# Altium PCB V1.PcbDoc
Units mm, origin at the board's own origin, x right, y up, seen from the top; angles counter-clockwise.
Board outline 152.4 x 101.6 mm, 2 copper layers (Top Layer, Bottom Layer); 11 components, 40 nets, 84 pads, 42 vias.
Unrouted connection lines stored in the file: 2.
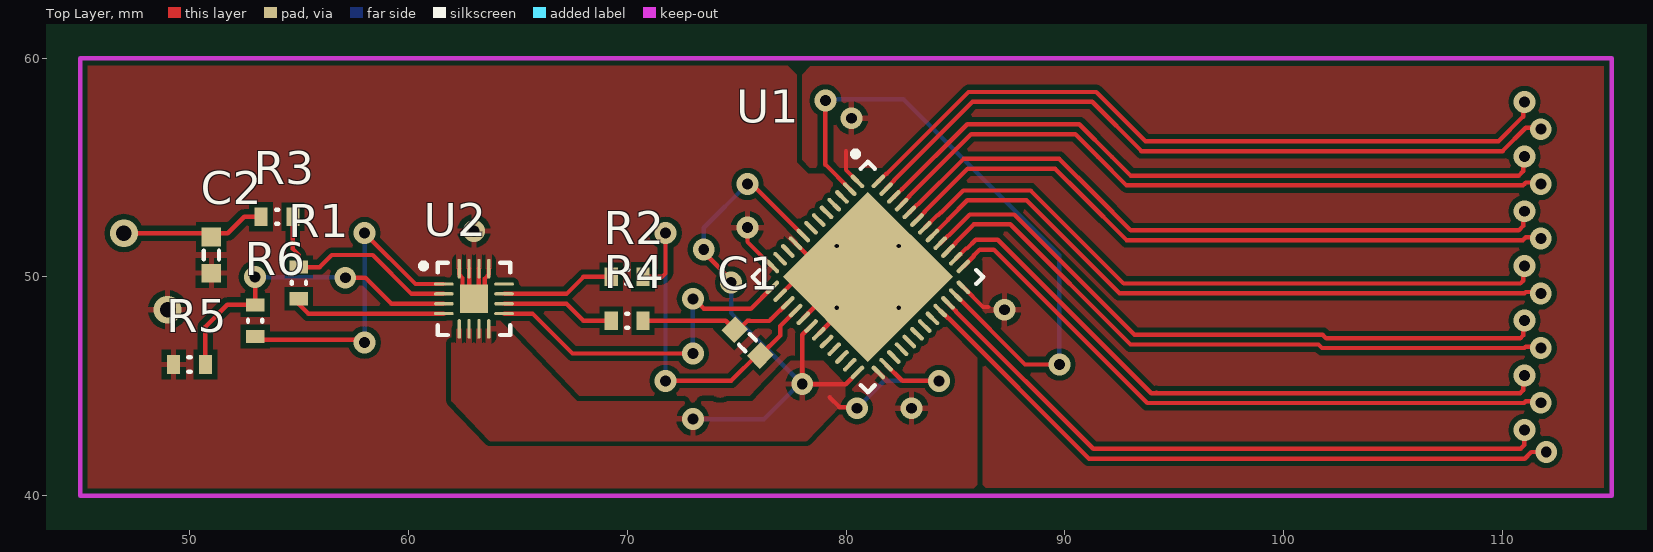
[diagram p0: Top Layer view]
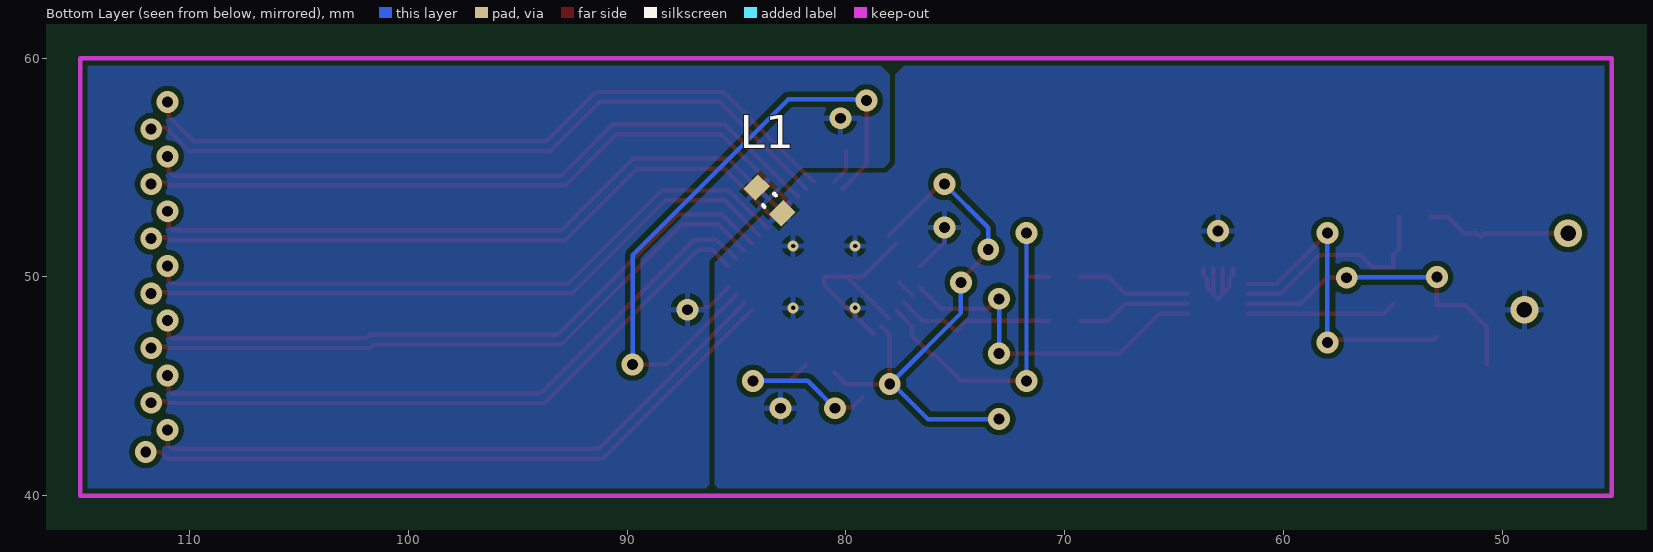
[diagram p1: Bottom Layer view, seen from below]

## Layer stack, top to bottom
Top Solder: solder mask 0.0102, Solder Resist, Dk 3.5
Top Layer: signal copper 0.0356
Dielectric1: dielectric 0.32, FR-4, Dk 4.8
Bottom Layer: signal copper 0.0356
Bottom Solder: solder mask 0.0102, Solder Resist, Dk 3.5

## Board outline
25.4,25.4 177.8,25.4 177.8,127 25.4,127

## Design rules (kind name [scope] priority, off if disabled: settings)
Clearance [All] p1: gap=0.24 ignorepadtopadclearanceinfootprint=FALSE except(0: Arc-Hole Track-Hole SMDPad-Hole THPad-Hole Via-Hole Fill-Hole Poly-Hole Region-Hole Text-Hole)
DiffPairsRouting DiffPairsRouting_1 [All] p1: maxlimit=0.254 minlimit=0.25 mostfreqgap=0.25 toplayer_minwidth=0.2 toplayer_maxwidth=0.381 toplayer_prefwidth=0.381 bottomlayer_minwidth=0.2 bottomlayer_maxwidth=0.381 bottomlayer_prefwidth=0.381 maxuncoupledlength=30
MatchedLengths MatchedLengths_2 [InDifferentialPair ('D_D0_D1')] p1: tolerance=25.4 checknetsindiffpair=FALSE checkdiffpairvsdiffpair=TRUE checkxsignals=TRUE checkothers=TRUE
MatchedLengths MatchedLengths_1 [InDifferentialPairClass('DATA')] p2: tolerance=5 checknetsindiffpair=FALSE checkdiffpairvsdiffpair=TRUE checkxsignals=TRUE checkothers=TRUE
MatchedLengths [InDifferentialPairClass('DATA')] p3: tolerance=0.5 checknetsindiffpair=TRUE checkdiffpairvsdiffpair=FALSE checkxsignals=FALSE checkothers=FALSE
PolygonConnect [All] p1: connectstyle=Relief reliefconductorwidth=0.254 reliefentries=4 polygonreliefangle="90 Angle" airgapwidth=0.254
RoomDefinition ShV_1 [InComponentClass('ShV_1')] p1: confinementstyle=ConfineIn formatcopy=TRUE lockcomponents=FALSE outline 45,40 115,40 115,60 45,60
RoutingVias [All] p1: holewidth=0.711 width=1.27 viastyle="Through Hole" minholewidth=0.45 minwidth=0.9 maxholewidth=0.711 maxwidth=1.27
SilkToSolderMaskClearance SilkscreenOverComponentPads [IsPad] p1: minsilkscreentomaskgap=0.254 clearancetoexposedcopper=TRUE
SolderMaskExpansion [All] p1: expansion=0.102 istentingtop=FALSE
Width [All] p1: maxlimit=0.254 minlimit=0.2 preferedwidth=0.254
28 further rules are at their usual default settings.

## Classes and differential pairs
differential pair CLKOut: +CLKOut_P -CLKOut_N
differential pair D_D12_D13: +D12_D13_P -D12_D13_N
differential pair D_D10_D11: +D10_D11_P -D10_D11_N
differential pair D_D8_D9: +D8_D9_P -D8_D9_N
differential pair D_D6_D7: +D6_D7_P -D6_D7_N
differential pair D_D4_D5: +D4_D5_P -D4_D5_N
differential pair D_D2_D3: +D2_D3_P -D2_D3_N
differential pair D_D0_D1: +D0_D1_P -D0_D1_N

## Components (designator, comment, footprint, x,y, rotation, side; value= is the part's Value field where it differs from the comment)
C1 "20pF" CAP_0603 75.5,47 r135 top
C2 "100pF" CAP_0603 51,51 r270 top
L1 "2mH" IND_0603 83.5,53.5 r45 bottom
R1 "1k" RES_0603 55,49.725 r270 top
R2 "1k" RES_0603 70,50 r0 top
R3 "1k" RES_0603 54,52.75 r180 top
R4 "1k" RES_0603 70,48 r0 top
R5 "1k" RES_0603 50,46 r0 top
R6 "1k" RES_0603 53,48 r270 top
U1 "ADS61B49" "QFN 48" 81,50 r315 top
U2 "ADA4932" "QFN PCP-16-2" 63,49 r0 top

## Footprints (in the part's own frame and the unit in brackets; to place one, negate y for a bottom-side part, rotate by r counter-clockwise, add the part's x,y. Pads: shape width x height; smd on the part's side, far side on the other; paste and mask are expansions set on the pad)
CAP_0603 [mm] "Chip Capacitor, 2-Leads, Body 1.6x0.8mm, IPC Medium Density"
  rect 0.85x0.9 smd: 1(-0.825,0) 2(0.825,0)
  silkscreen extent -0.2,-0.35 0.2,0.35, body extent -0.8,-0.4 0.8,0.4, height 0.9
IND_0603 [mm] "Chip Inductor, 2-Leads, Body 1,60x0,80mm, IPC Medium Density"
  rect 0.79x0.93 smd: 1(-0.83,0) 2(0.83,0)
  silkscreen extent -0.05,-0.37 0.05,0.37, body extent -0.81,-0.41 0.81,0.41, height 0.95
"QFN 48" [mm] "QFN, 48-Leads, Body 7,00x7,00mm, Pitch 0,50mm, Thermal Pad 5,60x5,60mm, IPC Medium Density"
  oval 0.8x0.2 smd: 1(-3.425,2.75) 2(-3.425,2.25) 3(-3.425,1.75) 4(-3.425,1.25) 5(-3.425,0.75) 6(-3.425,0.25) 7(-3.425,-0.25) 8(-3.425,-0.75) 9(-3.425,-1.25) 10(-3.425,-1.75) 11(-3.425,-2.25) 12(-3.425,-2.75) 25(3.425,-2.75) 26(3.425,-2.25) 27(3.425,-1.75) 28(3.425,-1.25) 29(3.425,-0.75) 30(3.425,-0.25) 31(3.425,0.25) 32(3.425,0.75) 33(3.425,1.25) 34(3.425,1.75) 35(3.425,2.25) 36(3.425,2.75)
  oval 0.2x0.8 smd: 13(-2.75,-3.425) 14(-2.25,-3.425) 15(-1.75,-3.425) 16(-1.25,-3.425) 17(-0.75,-3.425) 18(-0.25,-3.425) 19(0.25,-3.425) 20(0.75,-3.425) 21(1.25,-3.425) 22(1.75,-3.425) 23(2.25,-3.425) 24(2.75,-3.425) 37(2.75,3.425) 38(2.25,3.425) 39(1.75,3.425) 40(1.25,3.425) 41(0.75,3.425) 42(0.25,3.425) 43(-0.25,3.425) 44(-0.75,3.425) 45(-1.25,3.425) 46(-1.75,3.425) 47(-2.25,3.425) 48(-2.75,3.425)
  rect 5.5x5.5 smd: 49(0,0)
  silkscreen extent -4.5,-3.73 3.73,3.72, body extent -3.57,-3.58 3.58,3.57, height 1
"QFN PCP-16-2" [mm] "QFN, 16-Leads, Body 3,00x3,00mm, Pitch 0,45mm, Thermal Pad 1,30x1,30mm, IPC Medium Density"
  oval 0.9x0.15 smd: 1(-1.375,0.675) 2(-1.375,0.225) 3(-1.375,-0.225) 4(-1.375,-0.675) 9(1.375,-0.675) 10(1.375,-0.225) 11(1.375,0.225) 12(1.375,0.675)
  oval 0.15x0.9 smd: 5(-0.675,-1.375) 6(-0.225,-1.375) 7(0.225,-1.375) 8(0.675,-1.375) 13(0.675,1.375) 14(0.225,1.375) 15(-0.225,1.375) 16(-0.675,1.375)
  rect 1.3x1.3 smd: 17(0,0)
  silkscreen extent -2.43,-1.65 1.65,1.66, body extent -1.51,-1.5 1.5,1.51, height 0.8
RES_0603 [mm] "Chip Resistor, 2-Leads, Body 1,60x0,80mm, IPC Medium Density"
  rect 0.6x0.85 smd: 1(-0.725,0) 2(0.725,0)
  silkscreen extent -0.05,-0.33 0.05,0.33, body extent -0.8,-0.41 0.8,0.41, height 0.6

## Part data
C1 C2: library part C
L1: library part L
R1 R2 R3 R4 R5 R6: library part Res
U1: library part ADC
U2: library part "Op Amp"

## Via types
v1: diameter 1, hole 0.5, Top Layer to Bottom Layer, 36 vias
v2: diameter 0.5, hole 0.2, Top Layer to Bottom Layer, 4 vias
v3: diameter 1.27, hole 0.711, Top Layer to Bottom Layer, 2 vias

## Nets (pads, with @x,y where several pads share a name; then routed paths per layer and width w, separated by ;. In a path a pad name is that pad's centre, name@x,y a point inside that pad or via, vN(x,y) a via of type N, cw(c..) or ccw(c..) an arc to the next point about the centre after c; other vN are vias at no path point)
1.8V: U1.2 U1.35 | length 29.2
  Top Layer w0.2: v1(79.059,58.059) 79.059,55.134 U1.2@80.169,54.024 ; U1.35 88.182,46 v1(89.75,46)
  Bottom Layer w0.2: v1(79.059,58.059) 79.117,58.117 82.633,58.117 89.75,51 v1(89.75,46)
3.3V: U1.8 U1.18 U1.20 U1.22 U1.24 U1.26 U2.5 U2.6 U2.7 U2.8 | length 35
  Top Layer w0.2: v1(73.5,51.25) 73.5,51.125 74.75,49.875 v1(74.75,49.75) ; v1(75.5,54.25) 75.689,54.25 U1.8 ; U1.18 78,47.354 v1(78,45.1) 79.989,45.1 U1.24 ; 79.25,44.5 79.7,44.05 80.45,44.05 v1(80.5,44) ; U1.26 82.568,45.25 v1(84.25,45.25)
  Bottom Layer w0.2: v1(73,43.5) 76.25,43.5 77.85,45.1 v1(78,45.1) 74.75,48.35 v1(74.75,49.75) ; v1(73.5,51.25) 73.5,52.25 v1(75.5,54.25) ; v1(80.5,44) 81.75,45.25 v1(84.25,45.25)
AGND: C2.2 L1.1 R5.1 U1.9 U1.12 U1.14 U1.17 U1.19 U1.25 U1.49 U2.13 U2.14 U2.15 U2.16 U2.17 | length 18.8
  Top Layer w0.2: U2.16 62.325,50.104 62.477,49.952 62.477,49.523 U2.17@62.775,49.225 ; U2.15 U2.17@62.775,49.225 ; U2.14 U2.17@63.225,49.225 ; U2.13 63.675,50.104 63.5,49.929 63.5,49.5 U2.17@63.225,49.225 ; v1(75.5,52.25) 75.5,51.6 76.623,50.477 U1.12 ; U1.14 U1.49@77.568,49.75 ; U1.9 79.232,50 U1.49@79.939,50 ; U1.17 U1.49@79.939,50 ; U1.19 81,49.646 U1.49 U1.49@79.939,50 ; U2.17@62.775,49.225 U2.17 U2.17@63.225,49.225
  other v1: 83,44 63,52.1
  other v2: 79.586,48.586 82.414,48.586 79.586,51.414 82.414,51.414
  other v3: 49,48.5
CLKOut_N: U1.4
CLKOut_P: U1.5
D0_D1_N: U1.33 | length 30.6
  Top Layer w0.2: U1.33 84.319,48.462 84.675,48.107 84.696,48.107 91.107,41.696 111.014,41.696 111.317,41.999 v1(112,42) v1(112,42)
D0_D1_P: U1.34 | length 30.1
  Top Layer w0.2: U1.34 84.659,48.802 85.015,48.447 85.015,48.425 91.294,42.146 110.828,42.146 110.999,42.317 110.999,42.999 v1(111,43) v1@111.153,42.847
D2_D3_N: U1.37 | length 29.7
  Top Layer w0.2: U1.37 85.38,50.477 85.843,50.94 85.843,50.982 86.111,51.25 86.75,51.25 93.763,44.237 110.99,44.237 111.067,44.313 111.687,44.313 v1(111.75,44.25)
D2_D3_P: U1.38 | length 30
  Top Layer w0.2: U1.38 85.483,51.301 85.525,51.301 85.924,51.7 86.936,51.7 93.95,44.687 94.173,44.687 94.187,44.7 94.2,44.687 110.804,44.687 110.943,44.826 110.943,45.443 v1(111,45.5)
D4_D5_N: U1.39 | length 30
  Top Layer w0.2: U1.39@84.684,51.184 U1.39 84.659,51.198 85.015,51.553 85.015,51.575 85.845,52.405 87.505,52.405 93,46.91 101.594,46.91 101.754,46.75 111.004,46.75 111.067,46.813 111.687,46.813 v1(111.75,46.75)
D4_D5_P: U1.40 | length 30.3
  Top Layer w0.2: U1.40 84.319,51.538 84.675,51.893 84.696,51.893 85.658,52.855 87.691,52.855 93.186,47.36 101.78,47.36 101.94,47.2 110.817,47.2 110.943,47.326 110.943,47.943 v1(111,48)
D6_D7_N: U1.41 | length 30.3
  Top Layer w0.2: U1.41 84.681,52.62 84.681,52.638 85.543,53.5 88.25,53.5 92.5,49.25 111.004,49.25 111.067,49.313 111.687,49.313 v1(111.75,49.25)
D6_D7_P: U1.42 | length 30.6
  Top Layer w0.2: U1.42 84.159,52.806 84.194,52.806 84.345,52.956 84.363,52.956 85.357,53.95 88.436,53.95 92.686,49.7 110.817,49.7 110.943,49.826 110.943,50.443 v1(111,50.5)
D8_D9_N: U1.43 | length 30.9
  Top Layer w0.2: U1.43 83.245,52.612 83.6,52.967 83.6,52.989 85.556,54.944 89.556,54.944 90.75,53.75 92.818,51.682 110.935,51.682 ; 110.99,51.737 111.067,51.813 111.687,51.813 v1(111.75,51.75)
D8_D9_P: U1.44 | length 31.2
  Top Layer w0.2: U1.44 82.905,52.952 83.26,53.307 83.282,53.307 85.369,55.394 89.742,55.394 91.386,53.75 93.005,52.132 110.749,52.132 110.943,52.326 110.943,52.943 v1(111,53)
D10_D11_N: U1.45 | length 31.5
  Top Layer w0.2: U1.45 82.538,53.319 82.893,53.675 82.893,53.696 85.723,56.527 90.473,56.527 91.5,55.5 92.818,54.182 110.935,54.182 ; 110.99,54.237 111.067,54.313 111.687,54.313 v1(111.75,54.25)
D10_D11_P: U1.46 | length 31.9
  Top Layer w0.2: U1.46 82.198,53.659 82.553,54.015 82.575,54.015 85.537,56.977 90.66,56.977 92.136,55.5 93.005,54.632 110.749,54.632 110.943,54.826 110.943,55.443 v1(111,55.5)
D12_D13_N: U1.47 | length 33
  Top Layer w0.2: U1.47 81.831,54.026 82.186,54.382 82.186,54.403 85.783,58 91.25,58 93.5,55.75 110.004,55.75 111.067,56.813 111.687,56.813 v1(111.75,56.75)
D12_D13_P: U1.48 | length 33.3
  Top Layer w0.2: U1.48 81.491,54.366 81.846,54.722 81.868,54.722 85.596,58.45 91.436,58.45 93.686,56.2 109.817,56.2 110.943,57.326 110.943,57.943 v1(111,58)
DFS: U1.6
DGND: L1.2 U1.1 U1.36 | length 3.1
  Top Layer w0.2: 80,55.75 80,54.889 U1.1 ; U1.36 86.262,48.627 86.506,48.627
  other v1: 87.25,48.5 80.25,57.25
MODE: U1.23
NetC1_1: C1.1 R2.2 U1.16 | length 17.2
  Top Layer w0.2: R2.2 71.591,50 71.75,50.159 v1(71.75,52) ; v1(71.75,45.25) 74.75,45.25 C1.1@76,46.5 ; C1.1 76.992,47.325 76.992,47.76 77.312,48.08 U1.16
  Bottom Layer w0.2: v1(71.75,45.25) v1(71.75,52)
NetC1_2: C1.2 R4.2 U1.15 | length 7.3
  Top Layer w0.2: R4.2 74.5,48 C1.2 74.963,47.583 75.068,47.581 75.498,47.998 75.603,47.998 76.485,47.985 76.56,48.058 U1.15
NetC2_1: C2.1 R3.2 | length 6.7
  Top Layer w0.2: v3(47,52) 50.825,52 C2.1 51.175,52 51.75,52 52.5,52.75 R3.2
NetR1_1: R1.1 R3.1 U2.2 | length 10
  Top Layer w0.2: R3.1 54.725,51.275 55,51 R1.1 55.95,50.45 56.5,51 58.371,51 60.146,49.225 U2.2
NetR1_2: R1.2 U2.4 | length 6.8
  Top Layer w0.2: R1.2@55,48.75 55.425,48.325 U2.4
NetR2_1: R2.1 U2.11 | length 5.2
  Top Layer w0.2: U2.11 67.225,49.225 68,50 R2.1
NetR4_1: R4.1 U2.10 | length 5.2
  Top Layer w0.2: U2.10 67.225,48.775 68,48 R4.1
NetR5_2: R5.2 R6.1 U2.3 | length 14.8
  Top Layer w0.2: R5.2 50.725,47.725 51.725,48.725 R6.1 v1(53,50) ; v1(57.119,49.963) 58.037,49.963 59.225,48.775 U2.3
  Bottom Layer w0.2: v1(53,50) 53.019,49.981 57.1,49.981 v1(57.119,49.963)
NetR6_2: R6.2 U2.1 | length 14.7
  Top Layer w0.2: R6.2 53.138,47.138 57.863,47.138 v1(58,47) ; v1(58,52) 60.325,49.675 U2.1
  Bottom Layer w0.2: v1(58,47) v1(58,52)
NetU1_10: U1.10
NetU1_11: U1.11
OE: U1.7
OVR_SDOUT: U1.3
RST: U1.30
SCLK: U1.29
SDATA: U1.28
SEN: U1.27
VCM: U1.13 U2.9 | length 16.1
  Top Layer w0.2: U2.9 65.675,48.325 67.5,46.5 v1(73,46.5) ; v1(73,49) 73.05,49 73.508,48.542 75.653,48.542 U1.13
  Bottom Layer w0.2: v1(73,46.5) v1(73,49)
pads on no net: U1.21 U1.31 U1.32 U2.12

## Polygon pours and split planes (outlines as drawn)
AGND on Top Layer "AGND_L01_P048" (solid, pour order 48): 45.25,40.25 45.25,59.75 77.25,59.75 77.75,59.25 77.75,55.25 78.278,54.722 81.868,54.722 81.868,54.632 86,50.5 86,40.5 85.75,40.25
3.3V on Top Layer "Top Layer-No Net" (solid, pour order 36): 61.96,48.25 63.96,48.25 64.21,47.989 67.71,44.33 74.71,44.33 75.71,44.33 77.46,46.159 78.96,46.159 79.96,45.114 79.96,44.33 78.71,43.023 78.21,42.5 76.71,42.5 67.21,42.5 63.96,42.5 63.71,42.5 61.96,44.33
DGND on Top Layer "DGND_L01_P050" (solid, pour order 50): 78,59.25 78.5,59.75 114.75,59.75 114.75,40.25 86.5,40.25 86.25,40.5 86.25,50.75 82,55 78.25,55 78,55.25
no net on Top Layer "NONET_L01_P000" (solid, pour order 34): 76.2,52.7
AGND on Top Layer "AGND_L01_P009" (solid, pour order 35): 65,51.5
AGND on Top Layer "AGND_L01_P011" (solid, pour order 37): 61.2,51.3
3.3V on Top Layer "3.3V_L01_P029" (solid, pour order 38): 63.4,43.1
AGND on Bottom Layer "AGND_L02_P045" (solid, pour order 45): 45.25,40.25 85.75,40.25 86,40.5 86,50.75 82,54.75 78.25,54.75 77.75,55.25 77.75,59.25 77.25,59.75 45.25,59.75
DGND on Bottom Layer "DGND_L02_P042" (solid, pour order 42): 78.5,59.75 78.25,59.5 78,59.25 78,55.25 78.25,55 82,55 86.25,50.75 86.25,40.5 86.5,40.25 114.75,40.25 114.75,59.75 78.5,59.75 78.25,59.5 78.375,59.625
AGND on Bottom Layer "AGND_L02_P046" (solid, pour order 46): 48,60.5
DGND on Bottom Layer "DGND_L02_P044" (solid, pour order 44): 78.125,59.625
DGND on Bottom Layer "DGND_L02_P043" (solid, pour order 43): 78.375,59.625
AGND on Bottom Layer "AGND_L02_P033" (solid, pour order 39): 91.2,46.9

## Keep-outs
Keep-Out Layer:
  lines w0.2: 45,60 115,60 115,40 45,40 45,60 ; 45,60 45,60